# Allegro board NINA_B201_170322.brd
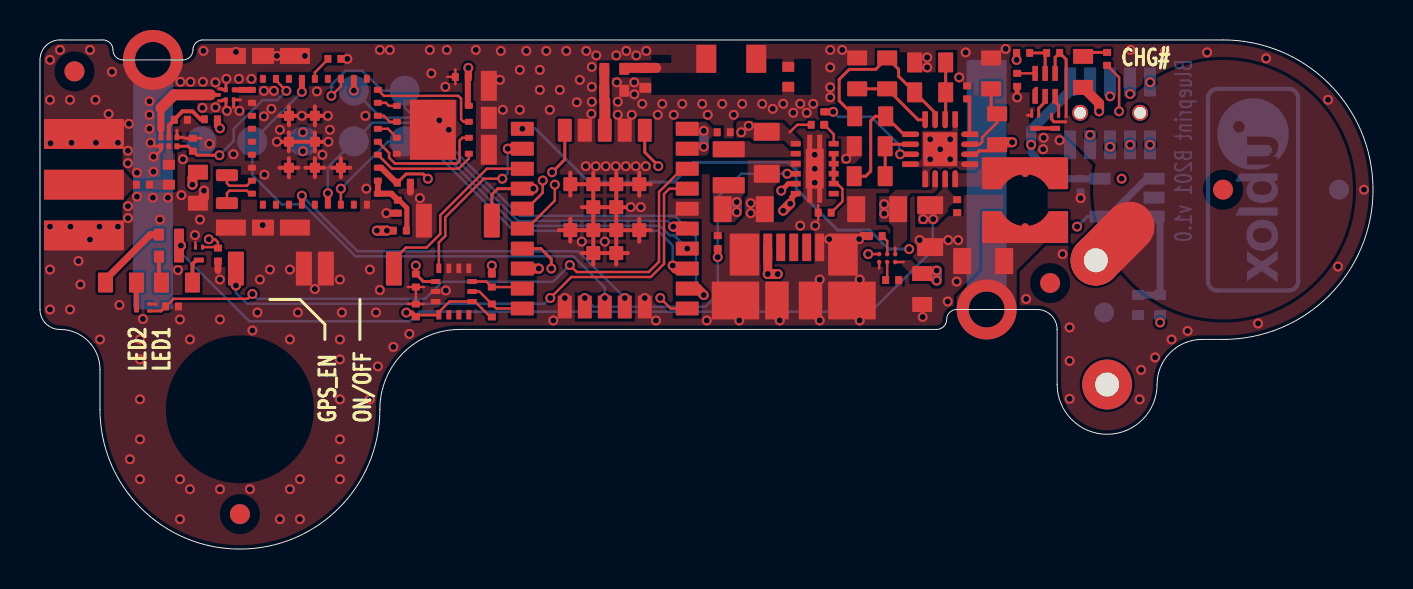
[diagram p0: board, top side]
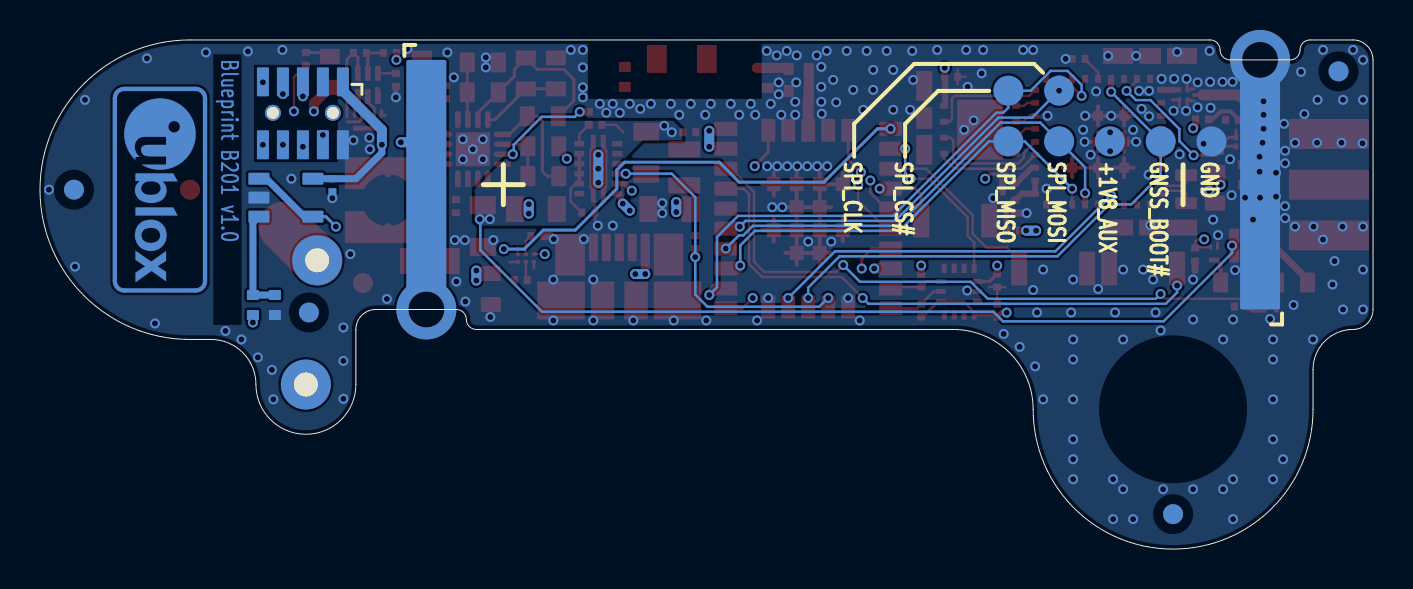
[diagram p1: board, bottom side, seen from below]

Outline 66.67 x 25.5 mm; copper layers: TOP, L2, L3, BOTTOM. Coordinates in mm from the lower left corner of the outline.
Outline path: 0,24.5 0,12 arc(0.29,11.29) 1,11 arc(2.41,10.41) 3,9 3,7 arc(10,0) 17,7 arc(18.17,9.83) 21,11 44.85,11 arc(45.2,11.15) 45.35,11.5 arc(45.5,11.85) 45.85,12 49.88,12 arc(50.58,11.71) 50.88,11 50.88,8.25 arc(53.38,5.75) 55.88,8.25 arc(56.53,9.84) 58.12,10.5 59.17,10.5 arc(66.67,18) 59.17,25.5 8.15,25.5 arc(7.8,25.35) 7.65,25 arc(7.5,24.65) 7.15,24.5 4.15,24.5 arc(3.8,24.65) 3.65,25 arc(3.5,25.35) 3.15,25.5 1,25.5 arc(0.29,25.21) 0,24.5

## Placement (name value [footprint] x y rotation side)
ANT3  1001312  [1001312_MIRRORED]  34.58 24.55 0 top
C1  100n  [0201]  34.2 20.87 180 top
C5  100n  [0201]  50.67 24.85 0 top
C6  10u  [0805]  36.35 19.85 90 top
C7  10u  [0805]  47.17 14.42 180 top
C8  100n  [0201]  18.8 13.45 270 top
C9  100n  [0201]  18.8 11.95 90 top
C10  10u  [0805]  35.2 17.02 0 top
C11  10u  [0805]  41.88 17.02 180 top
C12  10u  [0805]  44.52 16.17 270 top
C13  100n  [0201]  45.88 17.17 270 top
C14  10n  [0201]  46.38 22.87 90 top
C15  100n  [0201]  17.9 17.15 90 top
C16  100n  [0201]  18.2 18.35 0 top
C17  100n  [0201]  7.05 21.5 180 top
C18  1n  [0201]  5.15 18.25 180 top
C19  100n  [0201]  21.1 23.65 0 top
C23  1u  [0603]  44.12 13.02 270 top
C24  1u  [0603]  7.9 18.1 270 top
C113  100n  [0201]  52.05 18.22 270 bottom
D1  LED Green  [0603]  6.85 13.35 0 top
D4  LED Green  [0603]  52.17 23.9 270 top
D5  LED Green  [0603]  4.05 13.35 0 top
FID1  -  [FID1000]  10 1.75 0 top
FID2  -  [FID1000]  59.17 18 0 top
FID3  -  [FID1000]  1.73 23.92 0 top
FID4  -  [FID1000]  50.52 13.32 0 top
FID5  -  [FID1000]  10 1.75 180 bottom
FID6  -  [FID1000]  53.23 11.85 180 bottom
FID7  -  [FID1000]  64.97 18 180 bottom
FID8  -  [FID1000]  1.73 23.92 180 bottom
FIL1  -  [B8813]  9.3 22.75 0 top
J1  Header_2x5  [SFM210-LP_E-D5-SM-BK]  53.52 21.82 270 bottom
J2  CP1454-A3-ST  [CP1454A3ST]  59.17 18 225 top
J4  SMA (F) edge  [CONSMA003]  2.2 18.25 90 top
J5  SMT Clip  [S1001-46R]  11.15 16.1 0 top
J6  SMT Clip  [S1001-46R]  22.45 21.6 90 top
J7  SMT Clip  [S1001-46R]  11.15 24.7 0 top
J9  -  [0473460001]  37.7 12.45 90 top
L1  22u  [744031220]  49.27 17.47 270 top
L2  2u2  [MLP2016]  34.45 19.12 270 top
L3  6n2  [0402]  6.45 18.75 270 top
L6  6n2  [0402]  37.42 23.65 90 top
NOREF  -  [unnamed]  10 7 0 top
NOREF#2  -  [#2]  60.67 18 270 bottom
Q1  CSD17381F4  [0402FEMTO]  7.95 14.8 90 top
Q2  CSD17381F4  [0402FEMTO]  49.77 21.4 90 top
Q3  CSD17381F4  [0402FEMTO]  50.77 21.4 90 top
Q4  CSD17381F4  [0402FEMTO]  5.15 12.1 0 top
R1  4K7  [0201]  22.6 13.45 270 top
R2  4K7  [0201]  22.6 11.95 90 top
R3  470R  [0402]  6.45 14.65 180 top
R4  330  [0201]  49.17 24.85 0 top
R5  100k  [0201]  33.9 15.37 90 top
R6  100k  [0201]  8.9 14.75 270 top
R7  2K2  [0201]  48.88 23.5 270 top
R8  5M49  [0603]  44.52 22.87 0 top
R9  620k  [0603]  41.52 21.67 0 top
R10  2M43  [0603]  47.88 21.02 90 top
R11  5M49  [0603]  42.38 23.82 270 top
R12  100k  [0201]  39.25 16.85 180 top
R13  4M42  [0603]  44.52 24.37 180 top
R14  9M31  [0603]  47.58 23.82 90 top
R15  4M42  [0603]  40.88 23.82 90 top
R16  5M49  [0603]  41.5 18.67 0 top
R17  3M92  [0603]  41.5 20.17 180 top
R18  100k  [0201]  7.65 20.25 90 top
R19  10K  [0201]  41.8 15.67 180 top
R20  2K2  [0201]  42.62 13.47 0 top
R21  2K2  [0201]  53.38 24.55 90 top
R54  0R  [0201]  8.55 21.52 0 top
R55  0R  [0402]  28.73 24.05 180 top
R56  0R  [0402]  28.73 22.95 0 top
R57  0R  [0402]  30.27 23.6 270 top
R58  470R  [0402]  6.45 15.75 180 top
R59  100k  [0201]  6.6 12.15 0 top
R60  0R  [0201]  14.72 24.55 180 top
R61  2M  [0402]  54.92 12.22 270 bottom
R62  3M  [0402]  56.02 12.22 90 bottom
R63  0R  [0201]  39.23 21.57 270 top
R64  0R  [0201]  38.9 21.25 0 top
R65  0R  [0201]  18 15.95 0 top
SW2  -  [B3U-1000P]  16 14.05 180 top
SW3  -  [B3U-1000P]  11.5 14.05 0 top
SW4  -  [B3U-1000P]  20.9 16.45 180 top
TP1  TP_S1500  [TP_S1500_NO_PASTE]  15.7 22.96 180 bottom
TP2  TP_S1500  [TP_S1500_NO_PASTE]  18.24 22.96 180 bottom
TP3  TP_S1500  [TP_S1500_NO_PASTE]  18.24 20.42 180 bottom
TP4  TP_S1500  [TP_S1500_NO_PASTE]  15.7 20.42 180 bottom
TP6  TP_S1500  [TP_S1500_NO_PASTE]  13.16 20.42 180 bottom
TP7  TP_S1500  [TP_S1500_NO_PASTE]  8.08 20.42 180 bottom
TP8  TP_S1500  [TP_S1500_NO_PASTE]  10.62 20.42 180 bottom
U1  NINA-B111  [UBLOX_NINA_LGA42]  28.25 18.25 90 top
U2  BQ29700  [WSON6]  50.27 23.25 0 top
U3  -  [SLMD121H04L]  26.5 18.25 0 bottom
U4  LSM6DSL  [LGA-14L]  20.7 12.9 270 top
U5  BQ25504  [VQFN-16]  45.02 20.02 90 top
U6  TPS62740  [WSON12_3X2]  38.75 19.05 270 top
U7  EVA-M8M  [LGA43]  13.75 20.4 0 top
U8  BGA825L6S  [TSLP-6-3]  6.45 20.4 0 top
U9  MX25U1635E  [USON8]  19.65 21 0 top
U10  BQ25101  [DSBGA6]  42.38 14.57 90 top
U12  LPV801  [SOT23-5]  54.38 17.6 270 bottom
Y1  32.768KHz  [2SMD_20X12]  9.35 18.02 90 top

## Library data of the parts
ANT3 = 1001312
C1 C5-C19 C23 C24 C113 = CAP-NP
D1 D4 D5 = LED
FID1-FID8 = FIDUCIAL
FIL1 = SAW-5PIN
J1 = HEADER_2X5
J2 = CPXX54
J4 = SMA_RF_5P
J5-J7 = S1001-46R
J9 = 105017-0001
L1-L3 L6 = INDUCTOR
Q1-Q4 = N-MOS-FEMTO
R1-R21 R54-R65 = RES
SW2-SW4 = PUSHBUTTON_2P
TP1-TP4 TP6-TP8 = TEST_POINT
U1 = NINA-B1
U2 = BQ297XX
U3 = SOLARCELL-2P
U4 = LSM6DSL
U5 = BQ25504
U6 = TPS62740
U7 = EVA_M8M
U8 = BGA825L6S
U9 = MX25U1635E
U10 = BQ25101
U12 = OPAMP_TLV8801
Y1 = CRYSTAL_2P

## Footprints (pads in the part's own frame, mm; a bottom-side part is the same pattern mirrored in y, then rotated)
2SMD_20X12
  custom 0.6x1.1 smd: 1(-0.7,0) 2(0.7,0)
0201
  custom 0.35x0.4 smd: 1(-0.325,0) 2(0.325,0)
0402
  custom 0.5x0.6 smd: 1(-0.5,0) 2(0.5,0)
0402FEMTO
  custom 0.25x0.15 smd: 1(0.325,-0.175) 2(0.325,0.175)
  custom 0.25x0.5 smd: 3(-0.325,0)
0603
  custom 0.75x1 smd: 1(-0.775,0) 2(0.775,0)
0805
  custom 0.9x1.3 smd: 1(-1.05,0) 2(1.05,0)
1001312_MIRRORED
  custom 1x1.4 smd: 1(-1.25,0) 2(1.25,0)
0473460001
  custom 1.38x0.45 smd: 1(2.66,1.3) 2(2.66,0.65) 3(2.66,0) 4(2.66,-0.65) 5(2.66,-1.3)
  custom 2.1x1.476 smd: 6(2.3,2.462) 7(2.3,-2.462)
  custom 1.9x2.376 smd: 8(0,2.913) 9(0,-2.913)
  custom 1.9x1.176 smd: 10(0,0.838) 11(0,-0.838)
744031220
  custom 1.6x4.3 smd: 1(-1.35,0) 2(1.35,0)
B3U-1000P
  custom 0.8x1.7 smd: 1(-1.7,0) 2(1.7,0)
B8813
  custom 0.25x0.18 smd: 1(-0.385,0)
  custom 0.18x0.25 smd: 2(0,-0.25) 3(0.385,-0.25) 4(0.385,0.25) 5(0,0.25)
CONSMA003
  custom 1.5x4 smd: 1(0,0) 2(2.54,0) 3(-2.54,0)
CP1454A3ST
  round 2.5 hole 1.2: 1(11,2.8) 2(7,-2)
DSBGA6
  round 0.225 smd: A1(0.2,-0.4) A2(-0.2,-0.4) B1(0.2,0) B2(-0.2,0) C1(0.2,0.4) C2(-0.2,0.4)
FID1000
  round 1 smd: 1(0,0)
LGA43
  custom 0.4x0.3 smd: 1(-3.15,2.6) 2(-3.15,1.95) 3(-3.15,1.3) 4(-3.15,0.65) 5(-3.15,0) 6(-3.15,-0.65) 7(-3.15,-1.3) 8(-3.15,-1.95) 9(-3.15,-2.6) 19(3.15,-2.6) 20(3.15,-1.95) 21(3.15,-1.3) 22(3.15,-0.65) 23(3.15,0) 24(3.15,0.65) 25(3.15,1.3) 26(3.15,1.95) 27(3.15,2.6)
  custom 0.3x0.4 smd: 10(-2.6,-3.15) 11(-1.95,-3.15) 12(-1.3,-3.15) 13(-0.65,-3.15) 14(0,-3.15) 15(0.65,-3.15) 16(1.3,-3.15) 17(1.95,-3.15) 18(2.6,-3.15) 28(2.6,3.15) 29(1.95,3.15) 30(1.3,3.15) 31(0.65,3.15) 32(0,3.15) 33(-0.65,3.15) 34(-1.3,3.15) 35(-1.95,3.15) 36(-2.6,3.15)
  custom 0.5x0.5 smd: 37(-1.3,1.3) 38(-1.3,0) 39(-1.3,-1.3) 40(0,1.3) 41(0,0) 42(0,-1.3) 43(1.3,-1.3)
LGA-14L
  custom 0.476x0.25 smd: 1(-1.162,0.75) 2(-1.162,0.25) 3(-1.162,-0.25) 4(-1.162,-0.75) 8(1.162,-0.75) 9(1.162,-0.25) 10(1.162,0.25) 11(1.162,0.75)
  custom 0.25x0.476 smd: 5(-0.5,-0.912) 6(0,-0.912) 7(0.5,-0.912) 12(0.5,0.912) 13(0,0.912) 14(-0.5,0.912)
MLP2016
  custom 0.8x1.6 smd: 1(-0.9,0) 2(0.9,0)
S1001-46R
  rect 1.5x0.8 smd: 1(-1.6,0) 3(1.6,0)
  rect 1.1x0.8 smd: 2(0,0)
SFM210-LP_E-D5-SM-BK
  round 0.8 hole 0.6 unplated: (-0.025,-1.5) (-0.025,1.5)
  custom 1.45x0.6 smd: 1(-1.575,2) 2(1.575,2) 3(-1.575,1) 4(1.575,1) 5(-1.575,0) 6(1.575,0) 7(-1.575,-1) 8(1.575,-1) 9(-1.575,-2) 10(1.575,-2)
SLMD121H04L
  custom 2x12.5 smd: 1(20.85,0) 2(-20.85,0)
SOT23-5
  custom 0.6x1.05 smd: 1(-0.95,-1.35) 2(0,-1.35) 3(0.95,-1.35) 4(0.95,1.35) 5(-0.95,1.35)
TP_S1500_NO_PASTE
  round 1.5 smd: 1(0,0)
TSLP-6-3
  custom 0.25x0.3 smd: 1(0.4,0.225) 2(0,0.225) 3(-0.4,0.225) 4(-0.4,-0.225) 5(0,-0.225) 6(0.4,-0.225)
UBLOX_NINA_LGA42
  custom 0.7x1.15 smd: 1(-6.2,-4.125) 2(-5.2,-4.125) 3(-4.2,-4.125) 4(-3.2,-4.125) 5(-2.2,-4.125) 6(-1.2,-4.125) 7(-0.2,-4.125) 8(0.8,-4.125) 9(1.8,-4.125) 10(2.8,-4.125) 16(2.8,4.125) 17(1.8,4.125) 18(0.8,4.125) 19(-0.2,4.125) 20(-1.2,4.125) 21(-2.2,4.125) 22(-3.2,4.125) 23(-4.2,4.125) 24(-5.2,4.125) 25(-6.2,4.125)
  custom 1.15x0.7 smd: 11(2.725,-2) 12(2.725,-1) 13(2.725,0) 14(2.725,1) 15(2.725,2) 26(-6.125,2) 27(-6.125,1) 28(-6.125,0) 29(-6.125,-1) 30(-6.125,-2)
  custom 0.7x0.7 smd: 31(-3.425,-0.575) 32(-3.425,0.575) 33(-2.275,-1.725) 34(-2.275,-0.575) 35(-2.275,0.575) 36(-2.275,1.725) 37(-1.125,-0.575) 38(-1.125,0.575) 39(0.025,-1.725) 40(0.025,-0.575) 41(0.025,0.575) 42(0.025,1.725)
unnamed
  round 0 hole 7 unplated: (0,0)
USON8
  custom 0.4x0.3 smd: 1(-1.8,1.2) 2(-1.8,0.4) 3(-1.8,-0.4) 4(-1.8,-1.2) 5(1.8,-1.2) 6(1.8,-0.4) 7(1.8,0.4) 8(1.8,1.2)
  custom 2.3x3 smd: 9(0,0)
VQFN-16
  custom 0.28x0.85 smd: 1(-0.75,-1.475) 2(-0.25,-1.475) 3(0.25,-1.475) 4(0.75,-1.475) 9(0.75,1.475) 10(0.25,1.475) 11(-0.25,1.475) 12(-0.75,1.475)
  custom 0.85x0.28 smd: 5(1.475,-0.75) 6(1.475,-0.25) 7(1.475,0.25) 8(1.475,0.75) 13(-1.475,0.75) 14(-1.475,0.25) 15(-1.475,-0.25) 16(-1.475,-0.75)
  custom 1.7x1.7 smd: 17(0,0)
WSON6
  custom 0.28x0.85 smd: 1(-0.5,-0.525)
  custom 0.28x0.75 smd: 2(0,-0.575) 3(0.5,-0.575) 4(0.5,0.575) 5(0,0.575) 6(-0.5,0.575)
WSON12_3X2
  rect 0.28x0.5 smd: 1(-1.25,-0.95) 2(-0.75,-0.95) 3(-0.25,-0.95) 4(0.25,-0.95) 5(0.75,-0.95) 6(1.25,-0.95) 7(1.25,0.95) 8(0.75,0.95) 9(0.25,0.95) 10(-0.25,0.95) 11(-0.75,0.95) 12(-1.25,0.95)
  custom 3.4x0.9 smd: 13(0,0)

## Nets
+1V8: C1.2 C10.1 C16.1 C113.1 J1.1 L2.2 U1.9(VCC_IO) U1.10(VCC) U6.5(VOUT) U7.21(V_BKP) U12.5(VS+)
+1V8_AUX: C8.1 C9.1 C19.2 C24.1 R1.1 R2.1 R54.2 R65.1 TP6.1 U4.5(VDDIO) U4.8(VDD) U4.12(SPI_CS#/I2C_EN) U6.6(LOAD) U9.8(VCC)
+5V: C23.1 J9.1(P1) R21.1 U10.A2(IN)
+VBAT: C11.1 J2.1 R4.1 R62.1 U5.14(VBAT) U10.A1(OUT)
GND: ANT3.1(FEED) ANT3.2(GND) C1.1 C6.1 C7.2 C8.2 C9.2 C10.2 C11.2 C12.2 C13.2 C14.2 C15.1 C16.2 C17.1 C19.1 C23.2 C24.2 C113.2 FIL1.2(GND#2) FIL1.3(GND#3) FIL1.5(GND#5) J1.2 J4.2(SHIELD1) J4.3(SHIELD2) J5.1 J5.2 J5.3 J6.1 J6.2 J6.3 J7.1 J7.2 J7.3 J9.5(P5) J9.6(SHLD1) J9.7(SHLD2) J9.8(SHLD3) J9.9(SHLD4) J9.10(SHLD5) J9.11(SHLD6) L6.1 L6.2 Q1.2(S) Q2.2(S) Q4.2(S) R5.2 R6.2 R7.2 R12.2 R13.2 R14.2 R15.2 R17.2 R18.2 R19.2 R20.2 R55.1 R56.2 R57.1 R57.2 R59.2 R60.1 R61.2 SW2.2 SW3.2 SW4.2 TP7.1 U1.6(GND1) U1.12(GND2) U1.14(GND3) U1.26(GND4) U1.30(GND5) U1.31(GND6) U1.32(GND7) U1.33(GND8) U1.34(GND9) U1.35(GND10) U1.36(GND11) U1.37(GND12) U1.38(GND13) U1.39(GND14) U1.40(GND15) U1.41(GND16) U1.42(GND17) U3.2 U4.1(SPI_MISO/SA0) U4.2(SDX) U4.3(SCX) U4.6(GND1) U4.7(GND2) U5.1(VSS1) U5.5(OT_PROG) U5.12(AVSS) U5.13(VSS2) U5.17(EPAD) U6.3(GND) U6.13(EPAD) U7.2(GND1) U7.7(VDD_USB) U7.18(GND2) U7.37(GND3) U7.38(GND4) U7.39(GND5) U7.40(GND6) U7.41(GND7) U7.42(GND8) U7.43(GND9) U8.1(GND) U8.4(GNDRF) U9.4(GND) U9.9(EPAD) U10.C2(VSS) U12.2(VS-)
VBAT_ADC: U1.16(GPIO_16) U12.1(OUT) U12.4(IN-)
VBAT_OK: R63.1 U5.11(VBAT_OK)
+VSYS: C6.2 C12.1 C13.1 R3.1 R58.1 R64.1 U5.15(VSTOR) U6.1(VIN)
A/G_IRQ: U1.17(GPIO_17) U4.4(INT1)
GNSS_BOOT#: TP8.1 U1.28(GPIO_28/NFC1) U7.33(SAFEBOOT#)
GNSS_IRQ: U1.29(GPIO_29/NFC2) U7.13(PIO13/EXTINT)
I2C_SCL: R2.2 U1.25(I2C_SCL) U4.13(SPI_CLK/SCL)
I2C_SDA: R1.2 U1.24(I2C_SDA) U4.14(SPI_MOSI/SDA)
NINA_RST#: J1.9 SW4.1 U1.19(RESET#)
SPI_CLK: TP1.1 U1.5(SPI0_CLK) U7.29(SCL/SPI_CLK)
SPI_CS#: TP2.1 U1.2(SPI0_CS0#) U7.30(SDA/SPI_CS#)
SPI_MISO: TP3.1 U1.3(SPI0_MISO) U7.16(TXD/SPI_MISO)
SPI_MOSI: TP4.1 U1.4(SPI0_MOSI) U7.15(RXD/SPI_MOSI)
SW_EN: R5.1 U1.27(GPIO_27) U6.4(CTRL)
SWD_CLK: J1.10 U1.11(SWDCLK)
SWD_IO: J1.8 U1.15(SWDIO)
UART_CTS: J1.6 U1.21(UART_CTS)
UART_RTS: J1.7 U1.20(UART_RTS)
UART_RX: J1.4 U1.23(UART_RXD)
UART_TX: J1.5 U1.22(UART_TXD)
USR_LED1: Q1.1(G) R6.1 U1.1(SPI0_CS1#)
USR_LED2: Q4.1(G) R59.1 U1.8(SWO)
USR_SW1#/BOOT: SW3.1 U1.7(GPIO_7/BOOT)
USR_SW2#: SW2.1 U1.18(GPIO_18)
N17055452: R12.1 U6.8(VSEL4) U6.9(VSEL3) U6.10(VSEL2) U6.11(VSEL1)
N17055464: L2.1 U6.2(SW)
N17056292: D1.1(ANODE) R3.2
N17056302: D1.2(CATHODE) Q1.3(D)
N17057432: C15.2 R65.2 U7.19(VCC) U7.20(VCC_IO)
N17057986: U7.9(RTC_I) Y1.1(X1)
N17057993: U7.8(RTC_O) Y1.2(X2)
N17058672: U7.22(SQI_D0) U9.5(SI/SIO0)
N17058673: U7.23(SQI_CLK) U9.6(SCLK)
N17058674: U7.24(SQI_D2) U9.3(WP#/SIO2)
N17058675: U7.25(SQI_D1) U9.2(SO/SIO1)
N17058676: U7.26(SQI_CS#) U9.1(CS#)
N17058677: U7.27(SQI_D3) U9.7(NC/SIO3)
N17059368: C17.2 R54.1 U8.2(VCC)
N17059393: R18.1 U7.35(ANT_OFF) U8.6(PON)
N17059764: C18.2 J4.1(CENTER)
N17059767: C18.1 L3.2
N17059770: L3.1 U8.5(AI)
N17060104: R60.2 U7.32(D_SEL)
N17071610: L1.1 U5.16(LBST)
N17071613: C7.1 L1.2 R10.1 U3.1 U5.2(VIN_DC)
N17072900: R10.2 R14.1 U5.3(VOC_SAMP)
N17073727: C14.1 U5.4(VREF_SAMP)
N17074128: R8.1 R9.1 R11.1 U5.7(VRDIV)
N17074307: R9.2 R16.1 U5.9(OK_HYST)
N17074312: R8.2 R13.1 U5.6(VBAT_OV)
N17074329: R11.2 R15.1 U5.8(VBAT_UV)
N17074340: R16.2 R17.1 U5.10(OK_PROG)
N17084391: Q2.3(D) Q3.3(D)
N17085051: C5.2 J2.2 Q3.2(S) U2.4(VSS)
N17085476: C5.1 R4.2 U2.5(BAT)
N17085493: Q3.1(G) U2.3(DOUT)
N17085500: Q2.1(G) U2.2(COUT)
N17085527: R7.1 U2.6(V-)
N17107184: R19.1 U10.B1(TS)
N17110451: D4.1(ANODE) R21.2
N17111448: R20.1 U10.B2(ISET)
N17111453: D4.2(CATHODE) U10.C1(CHG#)
N17123784: FIL1.1(IN) U8.3(AO)
N17123793: FIL1.4(OUT) U7.1(RF_IN)
N17128578: R55.2 R56.1 U1.13(ANT)
N17136341: D5.1(ANODE) R58.2
N17136343: D5.2(CATHODE) Q4.3(D)
N17143494: R61.1 R62.2 U12.3(IN+)
N17149140: R63.2 R64.2 U6.12(EN)

Pads without a net: FID1 1; FID2 1; FID3 1; FID4 1; FID5 1; FID6 1; FID7 1; FID8 1; J1 3; J9 2 3 4; U2 1; U4 9 10 11; U6 7; U7 3 4 5 6 10 11 12 14 17 28 31 34 36

## Via types
v1: diameter 0.5, hole 0.3, TOP to BOTTOM, 339 vias
v2: diameter 3, hole 1.8, TOP to BOTTOM, 2 vias

## Routing (per net, layer and track width the routed paths; a pad name or vN(x,y) marks a point on that pad's centre or on a via; arc(x,y) is an arc through that point)
+1V8: length 30.6
  TOP w0.15: v1(19.4,18.55) 19.16,18.79 18.31,18.79 C16.1
  TOP w0.25: U6.5 37.42,18.3 v1(37.08,17.95)
  TOP w0.3: C16.1 17.82,18.35 17.07,19.1 U7.21
  L2 w0.5: v1(34.85,16.88) v1(34.85,17.38) ; v1(33.2,20.95) v1(33.2,20.15)
  L3 w0.45: 48.23,18.9 44.22,18.9
  L3 w0.5: 35,17.95 v1(37.08,17.95) 37.76,17.95 37.98,17.72 40.37,17.72 41.55,18.9 44.22,18.9 ; v1(49.58,20.25) 48.23,18.9
  BOTTOM w0.35: v1(49.58,20.25) 49.58,19.85 50.87,18.55 C113.1 U12.5
  BOTTOM w0.5: v1(33.2,20.95) v1(33.2,20.15) ; v1(34.85,17.38) v1(34.85,16.88) ; J1.1 51.52,22.95 49.58,21 v1(49.58,20.25)
+1V8_AUX: length 18.7
  TOP w0.125: R2.1 22.52,11.62 21.75,12.4 U4.12 20.48,12.4 19.95,11.87 U4.8
  TOP w0.15: U4.5 19.18,13.4 18.8,13.77 v1(18.8,14.2) ; C9.1 18.9,11.72 19.94,11.72 U4.8
  TOP w0.25: v1(18.32,11.84) 18.33,11.84 18.58,11.84 C9.1
  TOP w0.28: v1(37.52,17.3) 37.6,17.37 37.6,17.6 U6.6
  TOP w0.3: U9.8 21.4,22.25 21.4,23.62 C19.2
  TOP w0.35: R54.2 8.88,21.2 v1(9,21.07) ; v1(22.6,14.2) 22.6,13.77 ; v1(21.43,24.1) C19.2 ; v1(17.35,15.95) R65.1
  TOP w0.5: v1(16.85,15.95) v1(17.35,15.95) ; C24.1 7.63,18.6 7.63,18.25 v1(7.62,18.25) ; v1(37.17,16.95) v1(37.52,17.3)
  L2 w0.5: v1(37.17,16.95) v1(37.52,17.3) ; v1(16.85,15.95) v1(17.35,15.95)
  L3 w0.5: 7.85,19.22 7.85,20.56 8.37,21.07 v1(9,21.07) ; 13.15,19.05 v1(13.15,19.92) v1(13.15,20.87)
  BOTTOM w0.5: v1(37.17,16.95) v1(37.52,17.3) ; v1(16.85,15.95) v1(17.35,15.95)
+5V: length 24.3
  TOP w0.125: R21.1 53.98,23.62 v1(53.98,21.92) ; U10.A2 43.2,14.37
  TOP w0.45: J9.1 v1(36.4,13.77)
  TOP w0.5: v1(36.4,13.77) v1(36.9,13.77)
  L2 w0.5: v1(44.85,13.95) v1(44.85,13.45) ; v1(36.4,13.77) v1(36.9,13.77)
  L3 w0.125: 41.88,14.6 41.88,15 41.67,15.2 41.67,17.35 42.04,17.71 50.47,17.71 53.98,21.22 v1(53.98,21.92)
  BOTTOM w0.5: v1(44.85,13.95) v1(44.85,13.45) ; v1(36.4,13.77) v1(36.9,13.77)
+VBAT: length 16.4
  TOP w0.125: 42.77,14.77 42.77,15.1
  TOP w0.35: v1(48.85,24.5) R4.1
  L2 w0.5: v1(42.23,17.27) v1(42.23,16.8)
  L3 w0.15: v1(48.85,24.5) 55.4,24.5 56.38,23.52 56.38,20.46 55.4,19.49 55.4,17.45
  BOTTOM w0.35: R62.1 v1(56.02,11.35)
  BOTTOM w0.5: v1(42.23,17.27) v1(42.23,16.8)
GND: length 61.9
  TOP w0.125: C19.1 20.38,23.65 ; C19.1 20.77,23.27 ; C19.1 20.77,24.02 ; Q1.2 7.78,15.37 ; C12.2 44.35,15.12 ; U10.C2 41.98,14.05 ; C8.2 18.8,12.75 ; C8.2 18.4,13.12 ; C8.2 19.2,13.12 ; 38.92,16.47 R12.2 38.92,17.22 ; 18.8,12.27 18.8,12.65 ; 18.8,12.27 18.4,12.27 ; 18.8,12.27 19.2,12.27 ; J9.7 40.16,14.84
  TOP w0.15: 6.85,20.97 U8.1 7.17,20.62 ; 8.95,22.45 9.1,22.45 9.15,22.5 FIL1.2 9.3,22.12 ; 5.72,20.17 U8.4 6.05,19.97 5.88,19.8 ; 7.25,20.57 R18.2 8.05,20.57 ; 9.3,23.37 FIL1.5 9.15,23 9.1,23.05 8.95,23.05 ; 49.6,21.97 49.6,21.72 49.4,21.72 ; 9.69,22.13 FIL1.3 10.03,22.5 ; Q4.2 5.8,12.27
  TOP w0.2: U7.41 13.75,20.87 ; U7.41 13.75,19.92 ; U7.41 14.22,20.4 ; U7.41 U7.38 ; U1.32 27.68,14.25 ; U1.32 27.1,14.82 ; U1.32 U1.35 ; U1.32 U1.31 ; U1.42 U1.41 ; U1.42 26.52,17.7 ; U1.42 26.52,18.85 ; U1.41 27.68,18.85 ; U1.41 U1.38 ; U1.41 U1.40 ; U7.39 11.97,19.1 ; U7.39 12.45,18.62 ; U7.39 12.93,19.1 ; U7.39 12.45,19.57 ; U7.38 12.45,20.87 ; U7.38 11.97,20.4 ; U7.38 12.45,19.92 ; U7.40 13.28,21.7 ; U7.40 14.22,21.7 ; U7.40 13.75,22.17 ; U7.40 13.75,21.22 ; U1.39 29.98,18.85 ; U1.39 U1.40 ; U1.39 30.55,18.27 ; U1.39 29.98,17.7 ; U1.33 U1.34 ; U1.33 29.98,16.55 ; U1.33 29.98,15.4 ; U1.33 30.55,15.97 ; U1.34 U1.35 ; U1.34 U1.31 ; U1.34 U1.37 ; U7.42 13.75,18.62 ; U7.42 13.28,19.1 ; U7.42 14.22,19.1 ; U7.42 13.75,19.57 ; U7.37 12.93,21.7 ; U7.37 11.97,21.7 ; U7.37 12.45,21.22 ; U7.37 12.45,22.17 ; U7.43 14.57,19.1 ; U7.43 15.05,19.57 ; U7.43 15.05,18.62 ; U7.43 15.53,19.1 ; U1.31 29.4,14.82 ; U1.31 28.82,14.25 ; U1.35 U1.36 ; U1.35 U1.38 ; U1.40 28.82,18.85 ; U1.40 U1.37 ; U1.36 26.52,15.4 ; U1.36 25.95,15.97 ; U1.36 26.52,16.55 ; U1.38 U1.37 ; U1.38 27.1,17.12 ; U1.37 29.4,17.12
  TOP w0.25: R7.2 48.88,22.77
  TOP w0.35: v1(17.32,16.82) 17.9,16.82 ; C16.2 18.52,17.87 ; R6.2 8.9,13.95
  TOP w0.4: 41.48,15.67 41.12,15.67 v1(40.98,15.52)
  TOP w0.5: R55.1 29.27,24.1 R57.1 30.82,24.1 ; C24.2 8.2,17.62 v1(8.2,17.95)
  L3 w0.5: v1(52.05,17.57) C113.2 ; v1(29.55,17.12) v1(30.05,17.12) ; v1(30.3,19.17) v1(29.8,19.17) v1(29.3,19.17) v1(28.8,19.17) v1(28.3,19.17) v1(27.8,19.17) v1(27.3,19.17) ; v1(35.55,17.32) v1(35.55,16.82)
  BOTTOM w0.15: C113.2 v1(52.05,17.57)
  BOTTOM w0.5: v1(38.75,19.75) v1(38.75,19.05) v1(38.75,18.35)
  vias: v1(0.5,24.5) v1(0.5,22.5) v1(0.53,20.32) v1(0.5,16.15) v1(0.5,14) v1(0.5,12) v1(1,25) v1(1.5,22.5) v1(1.52,16.15) v1(1.5,12) v1(1.57,20.35) v1(1.93,14.42) v1(2.02,13.25) v1(2.5,25) v1(2.5,15.5) v1(2.77,22.5) v1(2.8,20.35) v1(2.98,16.15) v1(3,10.5) v1(3.43,21.79) v1(3.6,23.9) v1(3.9,20.35) v1(3.9,16.15) v1(3.98,12.22) v1(4.4,19.95) v1(4.4,19.32) v1(4.4,17.17) v1(4.4,16.57) v1(4.45,21.3) v1(4.5,4.5) v1(4.85,18.85) v1(4.85,17.65) v1(5,10.5) v1(5,9.5) v1(5,7.5) v1(5,5.5) v1(5,3.5) v1(5.15,11.52) v1(5.47,22.42) v1(5.47,21.75) v1(5.47,21.05) v1(5.53,20.35) v1(5.67,19.65) v1(5.67,18.9) v1(5.65,17.6) v1(6,16.5) v1(6.4,17.6) v1(6.9,13.97) v1(7.03,23.4) v1(7,11.5) v1(7,3.5) v1(7,1.5) v1(7.08,17.72) v1(7.15,19.52) v1(7.53,23.4) v1(7.5,10.5) v1(7.5,3) v1(7.75,15.72) v1(8,16.5) v1(8.12,22.1) v1(8.18,24.95) v1(8.15,23.4) v1(8.47,20.3) v1(8.78,23.37) v1(8.78,22.12) v1(9,13.5) v1(9,11.5) v1(9,3) v1(9.32,23.55) v1(9.35,21.95) v1(9.68,19.77) v1(9.8,24.9) v1(9.95,23.55) v1(9.97,21.95) v1(10.5,3) v1(10.57,23.55) v1(10.62,10.95) v1(10.88,11.85) v1(11,13.5) v1(11.14,16.23) v1(11.2,22.95) v1(11.2,21.67) v1(11.22,18.75) v1(11.5,14) v1(11.57,22.05) v1(11.7,22.95) v1(11.85,24.7) v1(11.85,20.4) v1(12,21) v1(12,1.5) v1(12.5,14) v1(12.5,10.5) v1(12.5,3) v1(12.9,11.85) v1(13,3.5) v1(13,1.5) v1(13.1,21.7) v1(13.25,24.7) v1(13.85,22.92) v1(13.75,13.02) v1(14.12,19.75) v1(14.4,21.7) v1(14.43,20.4) v1(14.5,21) v1(15,13.5) v1(15,10.5) v1(15,9.5) v1(15,7.5) v1(15,5.5) v1(15,4.5) v1(15,3.5) v1(15.1,11.85) v1(15.38,24.55) v1(16.27,21.7) v1(16.32,18.05) v1(16.5,14) v1(16.5,7.5) v1(16.81,11.85) v1(16.9,9.15) v1(17,25) v1(17,12.97) v1(17.5,25) v1(17.68,10.12) v1(18.48,10.77) v1(19,17.57) v1(19.5,25) v1(19.57,23.82) v1(19.98,21.47) v1(20.27,23.15) v1(20.3,12.95) v1(20.35,25) v1(20.45,21) v1(21.8,25) v1(23,23.5) v1(23.05,24.95) v1(23.15,22) v1(24,24) v1(24,22) v1(24.32,24.95) v1(25,24) v1(25,23) v1(25.32,24.95) v1(25.5,22) v1(25.68,11.45) v1(26,23) v1(26.25,12.57) v1(26.32,24.95) v1(26.85,22.37) v1(27,23.5) v1(27.1,15.4) v1(27.32,24.95) v1(27.6,24.15) v1(27.6,23.15) v1(27.6,22.4) v1(27.57,21.8) v1(27.82,24.72) v1(28.25,15.4) v1(28.82,24.72) v1(28.85,23.37) v1(28.9,22.4) v1(28.9,21.75) v1(29.32,24.95) v1(29.6,21.75) v1(29.73,23.37) v1(29.73,22.77) v1(29.82,24.72) v1(30.12,22.3) v1(30.25,12.57) v1(30.32,24.95) v1(30.81,11.45) v1(30.9,21.75) v1(31.12,22.3) v1(31.7,21.75) v1(32.12,22.3) v1(33.12,22.3) v1(33.4,21.75) v1(33.35,11.45) v1(34.12,22.3) v1(34.7,21.75) v1(34.98,11.45) v1(35.12,22.3) v1(36.12,22.3) v1(36.65,22.05) v1(37,11.45) v1(37.17,22.3) v1(37.67,21.85) v1(38.02,22.3) v1(38.02,16.2) v1(38.35,21.85) v1(38.67,22.3) v1(38.77,16.2) v1(39,13.5) v1(39,11.45) v1(39.52,25) v1(39.52,24.12) v1(39.52,23.12) v1(39.52,22.62) v1(39.48,15.52) v1(40.12,25) v1(40.33,19.55) v1(41,13.5) v1(41,11.45) v1(44,15.47) v1(44.15,11.62) v1(44.38,24.62) v1(44.38,24.12) v1(44.52,20.52) v1(44.52,19.52) v1(45.02,20.02) v1(45.43,15.47) v1(45.4,12.4) v1(45.52,20.52) v1(45.52,19.52) v1(45.92,15.47) v1(45.85,13.4) v1(45.98,23.62) v1(46.3,24.87) v1(48.3,25.05) v1(48.88,22.62) v1(49.33,12.52) v1(50.2,20.6) v1(50.17,20.02) v1(51,20.47) v1(51.15,14.77) v1(51.5,11.1) v1(51.5,9.42) v1(51.5,7.52) v1(54.1,18.55) v1(54.55,25) v1(55,7.5) v1(55.08,8.97) v1(55.77,9.6) v1(56.27,24.92) v1(56.6,10.5) v1(57.4,10.92) v1(58.38,24.87) v1(60.92,11.3) v1(61.33,24.57) v1(64.42,22.5) v1(64.92,14.15) v1(66.22,18) v2(5.65,24.5)
VBAT_ADC: length 36.9
  L3 w0.15: v1(43.48,15.02) 50.75,15.02 v1(51.88,16.15)
  BOTTOM w0.15: U12.4 52.38,16.65 v1(51.88,16.15) ; v1(43.48,15.02) 42.45,15.02 41.5,15.97 39.9,15.97 37.83,18.05 37.83,18.99 37.44,19.37 32.7,19.37 31.7,18.37 27.46,18.37 24.79,21.05 v1(24.12,21.05)
  BOTTOM w0.35: U12.1 55.35,18.55 53.45,16.65 U12.4
VBAT_OK: length 5.5
  TOP w0.125: U5.11 v1(43.02,19.77)
  TOP w0.35: R63.1 v1(39.67,21.9)
  BOTTOM w0.125: v1(43.02,19.77) 43.02,19.85 42.98,19.9 42.98,20.25 41.58,21.65 39.92,21.65 v1(39.67,21.9)
+VSYS: length 46.8
  TOP w0.125: 37.5,20.87 37.88,21.25 38.58,21.25
  TOP w0.5: R58.1 6.95,15.3 ; 6.95,15.3 6.95,15.1 ; 6.95,15.3 v1(7.05,15.2) 6.95,15.1 ; 6.95,15.1 R3.1
  L2 w0.5: v1(35.45,21.2) 35.4,21.2 v1(35.08,20.87) ; v1(44.17,16.52) v1(44.67,16.52)
  L3 w0.5: v1(44.17,16.52) v1(44.67,16.52) ; v1(35.45,21.2) 35.12,20.87 v1(35.08,20.87)
  BOTTOM w0.125: v1(7.05,15.2) 7.05,14.83 10.47,11.41 18.51,11.41 18.99,11.89 41.56,11.89 44.65,14.97 44.65,16.27
A/G_IRQ: length 8.7
  TOP w0.125: v1(23.12,18.55) 22.2,18.55 20.27,16.62 20.27,15.68 19.95,15.36 U4.4
  TOP w0.5: v1(23.4,20.05) U1.17
  BOTTOM w0.125: v1(23.4,20.05) 23.4,18.82 v1(23.12,18.55)
GNSS_BOOT#: length 26.8
  TOP w0.125: v1(28.25,12.57) U1.28
  TOP w0.3: U7.33 v1(13.1,22.9)
  BOTTOM w0.125: v1(28.25,12.57) 28.25,13.09 26.68,14.66 15.78,14.66 13.18,17.26 12.09,17.26 10.62,18.74 TP8.1 v1(13.1,22.9)
GNSS_IRQ: length 19.2
  TOP w0.3: U7.13 v1(13.1,17.7)
  TOP w0.5: v1(29.25,12.57) U1.29
  BOTTOM w0.125: v1(13.1,17.7) 15.89,14.91 26.91,14.91 v1(29.25,12.57)
I2C_SCL: length 2.9
  TOP w0.125: U4.13 21.98,12.9 22.82,12.05 U1.25
I2C_SDA: length 2.7
  TOP w0.125: U1.24 24.05,13.12 R1.2 22.32,13.4 U4.14
NINA_RST#: length 37.8
  TOP w0.15: SW4.1 22.6,17.75 22.9,18.05 U1.19
  TOP w0.5: v1(24.68,18.05) U1.19
  L3 w0.125: v1(24.68,18.05) 24.67,18.61 25.38,19.31 25.84,19.31 26.42,18.74 31.1,18.74 31.83,19.46 35.26,19.46 36.74,20.94 41.53,20.94 42.39,21.8 49.67,21.8 51.73,23.86 55.04,23.86 v1(55.52,23.38)
  BOTTOM w0.125: J1.9 v1(55.52,23.38)
SPI_CLK: length 20.2
  TOP w0.3: U7.29 v1(15.7,22.96)
  TOP w0.5: v1(31.68,16.15) 32.27,16.15 U1.5
  BOTTOM w0.125: v1(31.68,16.15) 31.39,16.44 23.9,16.44 18.73,21.61 17.05,21.61 v1(15.7,22.96) 15.7,23.02
SPI_CS#: length 28.1
  TOP w0.125: v1(14.57,22.7) 15.05,23.17 U7.30
  TOP w0.5: v1(33.2,12.72) 32.88,13.05 U1.2
  BOTTOM w0.125: v1(14.57,22.7) 14.57,23.25 15.28,23.95 16.12,23.95 17.11,22.96 TP2.1 18.24,22.11 18.49,21.86 18.84,21.86 24.01,16.69 31.76,16.69 32.81,15.63 32.81,13.11 v1(33.2,12.72)
SPI_MISO: length 22.3
  TOP w0.125: v1(15.05,18.05) U7.16
  TOP w0.5: v1(31.65,14.2) 31.8,14.05 U1.3
  BOTTOM w0.125: v1(15.05,18.05) 17.42,20.42 TP3.1 19.21,20.42 23.69,15.94 30.92,15.94 31.65,15.2 v1(31.65,14.2)
SPI_MOSI: length 23.4
  TOP w0.3: U7.15 v1(14.4,17.82)
  BOTTOM w0.125: v1(32.38,15.05) 31.71,15.71 31.49,15.71 31.02,16.19 23.8,16.19 18.63,21.36 16.64,21.36 TP4.1 14.4,19.12 v1(14.4,17.82)
SW_EN: length 17.2
  TOP w0.125: v1(27.25,12.57) U1.27
  TOP w0.28: U6.4 v1(37.38,18.8)
  TOP w0.35: R5.1 v1(33.9,14.62)
  BOTTOM w0.125: v1(27.25,12.57) 27.26,12.57 27.7,12.14 33.29,12.14 33.9,12.75 v1(33.9,14.62) 33.9,17.62 35.08,18.8 v1(37.38,18.8)
SWD_CLK: length 33
  TOP w0.125: 30.93,19.2 v1(30.93,19.18)
  TOP w0.15: U1.11 30.25,19.87 30.93,19.2
  L3 w0.125: v1(30.93,19.18) 31.46,19.71 35.16,19.71 36.63,21.19 41.42,21.19 42.29,22.05 49.56,22.05 51.63,24.11 55.41,24.11 56.11,23.41 56.11,20.84 v1(55.52,20.25)
SWD_IO: length 38.3
  TOP w0.15: U1.15 26.25,19.51 v1(25.61,18.87)
  L3 w0.125: v1(25.61,18.87) 25.93,18.87 26.31,18.49 31.21,18.49 31.93,19.21 35.37,19.21 36.84,20.69 41.63,20.69 42.49,21.55 49.77,21.55 51.83,23.61 54.67,23.61 55.86,22.42 55.86,21.21 54.91,20.25 v1(54.52,20.25)
UART_CTS: length 39
  TOP w0.125: v1(25.75,18.25) 25.75,17.45 24.35,16.05 U1.21
  L3 w0.125: v1(53.52,20.15) 54.06,20.69 54.99,20.69 55.61,21.31 55.61,22.32 54.57,23.36 51.94,23.36 49.88,21.3 42.6,21.3 41.73,20.44 36.94,20.44 35.47,18.96 32.04,18.96 31.31,18.24 25.76,18.24 v1(25.75,18.25)
UART_RTS: length 34.8
  TOP w0.125: v1(25.15,18.46) 25.15,17.85 24.35,17.05 U1.20
  L3 w0.125: v1(54.52,22.79) 54.2,23.11 52.1,23.11 50.04,21.05 42.7,21.05 41.84,20.19 37.05,20.19 35.57,18.71 32.14,18.71 31.42,17.99 26.34,17.99 26.16,17.81 25.44,17.81 25.15,18.1 v1(25.15,18.46)
  BOTTOM w0.125: v1(54.52,22.79) J1.7
UART_RX: length 32.6
  TOP w0.5: U1.23 v1(24.95,14.05)
  L3 w0.125: v1(52.52,20.74) 50,18.21 41.83,18.21 40.66,17.04 38.24,17.04 34.47,13.26 25.29,13.26 24.95,13.6 v1(24.95,14.05)
  BOTTOM w0.125: v1(52.52,20.74) J1.4
UART_TX: length 36.3
  TOP w0.15: U1.22 25.05,15.05 25.57,14.52 v1(25.57,14.05)
  L3 w0.125: v1(25.57,14.05) 25.57,13.67 25.74,13.51 34.36,13.51 38.14,17.29 40.55,17.29 41.73,18.46 49.89,18.46 51.44,20.01 51.44,22.09 52.02,22.67 v1(53.52,22.67)
  BOTTOM w0.125: v1(53.52,22.67) J1.5
USR_LED1: length 29.5
  TOP w0.125: Q1.1 8.85,15.12 R6.1 8.9,15.37 8.76,15.51 v1(8.45,15.51) ; U1.1 31.55,12.05 v1(31.02,12.57)
  L3 w0.125: v1(31.02,12.57) 30.59,13.01 21.71,13.01 20.45,11.75 18.85,11.75 18.51,11.41 10.47,11.41 8.45,13.43 v1(8.45,15.51)
USR_LED2: length 32.4
  TOP w0.125: U1.8 32.12,19.05 30.96,17.89 30.96,14.39 30.45,13.87 26.85,13.87 v1(26.5,14.22) ; v1(10.62,12.77) 10.39,12.54 6.69,12.54 6.3,12.15 6.28,12.15
  TOP w0.15: Q4.1 6.05,11.92 6.28,12.15
  BOTTOM w0.125: v1(10.62,12.77) 10.86,12.54 19.27,12.54 20.12,13.39 25.66,13.39 v1(26.5,14.22)
USR_SW1#/BOOT: length 28.4
  TOP w0.125: v1(25.52,12.57) 26.57,13.62 30.55,13.62 31.21,14.29 31.21,17.78 31.48,18.05 U1.7
  TOP w0.5: v1(9.8,13.2) SW3.1
  BOTTOM w0.125: v1(9.8,13.2) 9.8,12.85 10.36,12.29 25.24,12.29 v1(25.52,12.57)
USR_SW2#: length 9.3
  TOP w0.125: SW2.1 17.7,14.5 18.3,15.1 19.34,15.1 20.02,15.79 20.02,16.72 22.35,19.05 U1.18
N17055452: length 3.5
  TOP w0.125: U6.8 39.88,18.3 40.14,18.04 40.14,17.41 R12.1
  TOP w0.2: U6.8 U6.9 U6.10 U6.11
N17056292: length 1.4
  TOP w0.2: 6.08,13.35 5.95,13.47 R3.2
N17056302: length 1.3
  TOP w0.2: D1.2 7.62,14.27 7.83,14.47 Q1.3
N17057432: length 3.5
  TOP w0.25: R65.2 18.35,15.97 18.35,17.09 17.96,17.47 C15.2
  TOP w0.3: U7.20 U7.19 17.57,17.8 C15.2
N17057986: length 1.9
  TOP w0.125: U7.9 10.5,17.8 10.35,17.95 9.47,17.95 9.35,17.82 9.35,17.32
N17057993: length 1.8
  TOP w0.125: 9.35,18.72 9.35,18.32 9.47,18.2 10.35,18.2 U7.8
N17058672: length 5.3
  TOP w0.125: U9.5 21.45,19.56 20.94,19.05 17.6,19.05 U7.22
N17058673: length 6.3
  TOP w0.125: U7.23 17.46,19.84 17.46,19.6 17.75,19.31 20.85,19.31 20.99,19.45 20.99,20.46 21.12,20.6 U9.6
N17058674: length 1.1
  TOP w0.125: U7.24 17.4,21.05 U9.3
N17058675: length 1.1
  TOP w0.125: U9.2 17.5,21.4 17.2,21.7 U7.25
N17058676: length 1
  TOP w0.125: U7.26 17.3,22.35 17.45,22.2 U9.1
N17058677: length 5.8
  TOP w0.125: U9.7 21.19,21.4 21.06,21.52 21.06,22.56 20.93,22.7 17.2,22.7 U7.27
N17059368: length 2.8
  TOP w0.2: U8.2 6.45,21.22 C17.2 6.72,21.52 7.12,21.92 7.63,21.92 8.03,21.52 8.22,21.52
N17059393: length 8.2
  TOP w0.125: U7.35 11.8,23.47 v1(12.32,22.95)
  TOP w0.15: v1(8.97,19.72) 7.85,19.72 R18.1 7.4,20.17 U8.6
  BOTTOM w0.125: v1(12.32,22.95) 11.86,22.49 11.13,22.49 9.68,21.04 9.68,20.43 v1(8.97,19.72)
N17060104: length 1.3
  TOP w0.125: U7.32 13.75,23.87 14.4,24.52 R60.2
N17071613: length 5.5
  TOP w0.15: U5.2 46.8,19.77 46.98,19.95 47.58,19.95 R10.1
  TOP w0.5: R10.1 48,20.37 v1(48.62,20.37)
  BOTTOM w0.5: U3.1 47.35,19.87 47.85,20.37 v1(48.62,20.37)
  vias: v2(47.35,12)
N17072900: length 3.8
  TOP w0.125: R10.2 47.88,21.36 47.12,20.61 47.12,20.4 47,20.27 U5.3
  TOP w0.15: R10.2 47.58,22.1 R14.1
N17073727: length 1.8
  TOP w0.15: C14.1 46.5,22.42 U5.4
N17074128: length 9.1
  TOP w0.15: R9.1 39.98,22.45 39.98,23.52 40.48,24.02 41.8,24.02 R11.1 42.95,24.03 42.95,23.68 R8.1 44.77,21.85 U5.7
N17074307: length 5.9
  TOP w0.15: U5.9 43.2,20.77 R9.2 41.77,21.67 41.55,21.45 41.55,18.92 41.3,18.67 R16.1
N17074312: length 2.9
  TOP w0.15: R13.1 R8.2 45.3,21.52 U5.6
N17074329: length 4
  TOP w0.15: U5.8 43.92,21.5 R11.2 R15.1
N17074340: length 2.8
  TOP w0.15: R16.2 R17.1 42.38,20.27 U5.10
N17084391: length 1
  TOP w0.2: Q3.3 Q2.3
N17085051: length 7.8
  TOP w0.15: U2.4 50.77,24.62 C5.2 51.33,24.52 51.33,21.65 ; 51.3,21.4 50.73,21.4 50.6,21.52 50.6,21.72
  TOP w2.5: 54.5,16.15 52.8,14.45 J2.2
N17085476: length 1.9
  TOP w0.15: U2.5 50.27,24.77 C5.1 R4.2
N17085493: length 1
  TOP w0.15: U2.3 50.77,22.4 50.95,22.22 50.95,21.72
N17085500: length 1.1
  TOP w0.15: 49.95,21.72 49.95,22.07 50.27,22.39 U2.2
N17085527: length 0.9
  TOP w0.125: U2.6 R7.1
N17107184: length 1
  TOP w0.125: 42.38,14.77 42.38,15.42 R19.1
N17110451: length 1.3
  TOP w0.15: 52.17,24.67 52.38,24.87 R21.2
N17111448: length 0.9
  TOP w0.125: R20.1 42.38,13.55 U10.B2
N17111453: length 19
  TOP w0.125: 41.98,14.77 v1(41.42,14.77)
  TOP w0.5: D4.2 52.98,22.32 v1(52.98,21.92)
  L3 w0.125: v1(41.42,14.77) 41.42,17.45 41.93,17.96 50.37,17.96 52.98,20.57 v1(52.98,21.92)
N17123784: length 4.6
  TOP w0.18: 8.53,22.75 FIL1.1
  TOP w0.2: U8.3 6.05,21.02
  TOP w0.35: 6.05,21.02 6.05,22.1
  TOP w0.55: 8.53,22.75 6.7,22.75 6.05,22.1
N17123793: length 0.9
  TOP w0.18: 9.75,23 FIL1.4
  TOP w0.25: 10,23 9.75,23
  TOP w0.3: U7.1 10,23
N17128578: length 3.1
  TOP w0.5: R55.2 R56.1 28.23,22.5 28.25,22.47
  TOP w0.55: 28.25,22.47 U1.13
N17136341: length 3.8
  TOP w0.35: R58.2 5.53,15.75 3.27,13.5 D5.1
N17136343: length 1.2
  TOP w0.25: Q4.3 D5.2
N17143494: length 5.1
  BOTTOM w0.35: U12.3 56.02,16.35 R62.2 R61.1
N17149140: length 1.1
  TOP w0.125: U6.12 39.7,20.77 R64.2

## Copper pours and planes (outline as drawn; the poured copper is in the pictures)
+1V8 on TOP: 33.65,18.62 35.25,18.62 35.25,17.8 35.1,17.65 35.1,16.75 34.73,16.37 33.73,16.37 33.65,16.45
+1V8 on TOP: 34.05,21.07 33.65,21.07 33.33,21.4 31.8,21.4 31.8,20.7 32.95,20.7 33.02,20.62 33.02,20.47 32.95,20.4 31.8,20.4 31.8,19.7 33.33,19.7 33.45,19.82 33.45,20.47 33.65,20.67 34.05,20.67
+1V8 on L3: 22.02,21.55 19.07,18.6 19.07,16.77 19.48,16.37 34.7,16.37 35.15,16.82 35.15,17.47 35.25,17.57 35.25,18.52 34.2,19.57 34.2,21.17 34.02,21.35 27.15,21.35 26.95,21.55
+1V8_AUX on L3: 35.4,16.85 34.77,16.22 19.4,16.22 18.93,16.7 18.93,18.67 21.8,21.55 21.8,24.35 21.68,24.47 21.2,24.47 16.07,19.35 7.6,19.35 7.35,19.1 7.35,18.02 10.65,14.72 16.62,14.72 18.07,13.27 18.07,11.67 18.15,11.6 18.43,11.6 18.77,11.95 20.35,11.95 22,13.6 34.17,13.6 37.77,17.2 37.77,17.4 37.6,17.57 35.4,17.57
+5V on TOP: 43.88,14.17 44.58,14.17 44.6,14.2 44.98,14.2 45.1,14.07 45.1,13.32 44.98,13.2 44.73,13.2 44.5,13.42 43.62,13.42 43.62,13.7 43.12,14.2 43.12,14.47 43.58,14.47
+5V on L3: 35.83,13.57 35.83,12.27 44.55,12.27 45.33,13.05 45.33,14.22 42.5,14.22 42.08,14.65 36.9,14.65
+VBAT on TOP: 44.9,18.67 44.9,18.02 44.7,17.82 43.58,17.82 43.38,17.62 43.38,15.5 42.85,14.97 42.67,14.97 42.67,16.12 42.42,16.37 41.98,16.37 41.98,17.67 42.48,17.67 42.8,18 44.12,18 44.15,17.97 44.38,17.97 44.4,18 44.55,18 44.65,18.1 44.65,18.67
+VBAT on L3: 52.1,8.22 53.38,6.95 54.65,8.22 54.65,9.15 56.5,11 56.5,16.5 55.48,17.52 42.23,17.52 42.05,17.45 41.98,17.27 41.98,16.1 42.2,15.87 52.83,15.87 54.2,14.5 52.83,13.12 52.1,13.12
GND on BOTTOM (solid shape): 61.9,14.48 61.42,14.16 61.9,13.85 61.9,13.36 61.1,13.93 60.37,13.41 60.37,13.88 60.79,14.16 60.37,14.43 60.37,14.93 61.11,14.4 61.9,14.95
GND on BOTTOM (solid shape): 61.9,18.44 61.71,18.44 61.86,18.23 61.9,18.15 61.92,18.05 61.93,17.99 61.93,17.96 61.92,17.88 61.9,17.79 61.86,17.7 61.8,17.6 61.73,17.52 61.63,17.45 61.51,17.4 61.35,17.35 61.2,17.33 61.05,17.33 60.92,17.35 60.78,17.38 60.66,17.43 60.56,17.5 60.48,17.58 60.4,17.71 60.35,17.84 60.34,17.93 60.34,18 60.35,18.09 60.64,18.09 60.64,18.06 60.66,17.98 60.69,17.92 60.73,17.87 60.77,17.83 60.84,17.78 60.92,17.76 61.05,17.74 61.18,17.74 61.26,17.75 61.36,17.77 61.43,17.79 61.49,17.83 61.54,17.88 61.58,17.93 61.6,17.98 61.61,18.04 61.61,18.09 61.61,18.13 61.58,18.19 61.55,18.25 61.5,18.31 61.45,18.34 61.38,18.38 61.3,18.4 61.2,18.41 61.13,18.42 61.11,18.42 61.02,18.41 60.9,18.39 60.79,18.34 60.74,18.31 60.71,18.27 60.68,18.22 60.65,18.15 60.64,18.09 60.35,18.09 60.38,18.18 60.42,18.26 60.47,18.33 60.55,18.41 59.79,18.41 60.01,18.81 61.9,18.81
GND on BOTTOM (solid shape): 61.31,16.48 61.43,16.45 61.51,16.42 61.59,16.38 61.68,16.32 61.73,16.26 61.8,16.17 61.84,16.1 61.89,16 61.91,15.89 61.93,15.77 61.93,15.66 61.92,15.59 61.91,15.52 61.89,15.46 61.85,15.36 61.81,15.3 61.77,15.23 61.71,15.16 61.65,15.1 61.58,15.05 61.47,15 61.35,14.96 61.23,14.93 61.16,14.93 61.1,14.93 61.01,14.93 60.91,14.96 60.81,14.99 60.7,15.05 60.59,15.13 60.52,15.2 60.45,15.29 60.4,15.39 60.37,15.51 60.35,15.63 60.34,15.69 60.34,15.74 60.66,15.74 60.66,15.7 60.67,15.65 60.68,15.6 60.71,15.54 60.75,15.49 60.78,15.44 60.83,15.41 60.88,15.39 60.94,15.36 61,15.35 61.09,15.34 61.17,15.34 61.24,15.34 61.31,15.36 61.38,15.38 61.43,15.41 61.5,15.46 61.53,15.5 61.56,15.55 61.58,15.61 61.6,15.66 61.61,15.69 61.61,15.72 61.6,15.77 61.58,15.83 61.56,15.88 61.5,15.97 61.44,16.02 61.38,16.04 61.31,16.07 61.23,16.08 61.16,16.09 61.11,16.09 60.98,16.07 60.91,16.05 60.83,16.02 60.78,15.97 60.74,15.93 60.7,15.87 60.68,15.82 60.66,15.74 60.34,15.74 60.35,15.83 60.37,15.94 60.41,16.07 60.47,16.17 60.55,16.27 60.63,16.34 60.72,16.39 60.83,16.45 60.96,16.48 61.05,16.5 61.2,16.5
GND on BOTTOM (solid shape): 61.58,19.24 61.53,19.21 61.42,19.16 61.31,19.11 61.2,19.07 61.08,19.04 60.97,19.02 60.85,19 60.73,19 60.61,19 60.49,19.01 60.37,19.02 60.25,19.05 60.13,19.08 60.02,19.12 59.91,19.17 59.8,19.22 59.7,19.28 59.6,19.35 59.51,19.43 59.42,19.51 59.34,19.6 59.26,19.69 59.19,19.79 59.13,19.89 59.07,19.99 59.02,20.1 58.98,20.22 58.94,20.33 58.92,20.45 58.9,20.57 58.89,20.69 58.88,20.81 58.89,20.93 58.9,21.05 58.93,21.17 59.68,21.17 59.68,21.12 59.69,21.08 59.7,21.03 59.73,20.99 59.76,20.95 59.79,20.92 59.83,20.9 59.87,20.88 59.92,20.87 59.97,20.86 60.01,20.87 60.06,20.88 60.1,20.9 60.14,20.92 60.18,20.95 60.21,20.99 60.23,21.03 60.24,21.08 60.25,21.13 60.25,21.17 60.24,21.22 60.23,21.26 60.21,21.31 60.18,21.34 60.14,21.38 60.1,21.4 60.06,21.42 60.01,21.43 59.97,21.44 59.92,21.43 59.87,21.42 59.83,21.4 59.79,21.38 59.75,21.34 59.73,21.31 59.7,21.26 59.69,21.22 59.68,21.17 58.93,21.17 58.96,21.28 58.99,21.4 59.04,21.51 59.09,21.62 59.15,21.72 59.22,21.82 59.29,21.92 59.37,22.01 59.45,22.09 59.54,22.17 59.64,22.24 59.74,22.31 59.84,22.37 59.95,22.42 60.06,22.47 60.18,22.5 60.3,22.53 60.41,22.55 60.53,22.57 60.65,22.57 60.77,22.57 60.89,22.56 61.01,22.54 61.13,22.51 61.25,22.48 61.36,22.44 61.47,22.39 61.57,22.33 61.68,22.27 61.77,22.2 61.86,22.12 61.95,22.04 62.03,21.95 62.11,21.85 62.18,21.75 62.24,21.65 62.29,21.54 62.34,21.43 62.38,21.32 62.41,21.2 62.44,21.09 62.45,20.97 62.46,20.85 62.46,20.73 62.45,20.61 62.44,20.49 62.41,20.37 62.38,20.25 62.34,20.14 62.3,20.03 62.24,19.92 62.18,19.82 62.11,19.72 62.04,19.63 61.96,19.54 61.91,19.49 61.9,19.51 61.9,19.64 61.68,19.64 61.75,19.7 61.81,19.78 61.87,19.88 61.91,19.97 61.93,20.07 61.94,20.15 61.94,20.17 61.92,20.27 61.9,20.35 61.86,20.43 61.81,20.5 61.76,20.55 61.7,20.58 61.61,20.62 61.55,20.63 61.36,20.65 60.37,20.65 60.37,20.25 61.23,20.25 61.36,20.24 61.44,20.23 61.48,20.22 61.55,20.17 61.59,20.12 61.61,20.06 61.62,19.99 61.61,19.92 61.59,19.86 61.57,19.82 61.52,19.77 61.47,19.72 61.41,19.7 61.31,19.67 61.17,19.67 60.37,19.67 60.37,19.26 61.57,19.26
GND on TOP: 10,0.2 3.2,7 3.2,9 2.54,10.54 1,11.2 0.43,11.45 0.2,12.02 0.2,16.35 4.13,16.35 4.13,17.3 4.75,17.92 6.88,17.92 6.88,19.9 7.1,19.9 7.1,20.9 6.48,20.9 6.48,21.82 6.7,21.82 7.03,22.15 7.73,22.15 7.88,22 7.88,22.35 6.85,22.35 6.48,21.97 6.48,22.12 7.08,22.72 9.03,22.72 9.03,22.2 9.95,22.2 9.95,22.72 10.93,22.72 10.93,23.2 16.55,23.2 16.55,17.5 17.25,17.5 17.25,20.3 18.18,20.3 18.18,22.5 17.5,22.5 17.5,20.75 17.25,20.75 17.25,23.3 16.65,23.3 16.65,23.9 10.85,23.9 10.85,23.3 9.03,23.3 9.03,22.77 6.33,22.77 5.75,22.2 5.75,20.9 5.8,20.85 5.8,19.9 6.03,19.9 6.03,18.57 4.75,18.57 4.13,19.2 4.13,20.15 0.2,20.15 0.2,24.47 0.44,25.06 1.03,25.3 3.15,25.3 3.36,25.21 3.66,24.5 4.15,24.3 4.15,24.5 7.15,24.5 7.15,24.3 7.64,24.5 7.94,25.21 8.15,25.3 34.32,25.3 59.18,25.3 66.47,18 59.18,10.7 58.13,10.7 56.39,9.98 55.67,8.25 53.38,5.95 51.08,8.25 51.08,11 50.72,11.85 49.88,12.2 45.85,12.2 45.35,11.99 45.06,11.29 44.85,11.2 21,11.2 18.03,9.97 16.8,7 ; 50 cut-outs
GND on BOTTOM: 8.8,25.3 30.57,25.3 30.57,22.55 39.27,22.55 39.27,25.3 59.17,25.3 66.47,18 59.17,10.7 58.12,10.7 56.39,9.98 55.67,8.25 53.38,5.95 51.08,8.25 51.08,11 50.72,11.85 49.88,12.2 45.85,12.2 45.35,11.99 45.06,11.29 44.85,11.2 21.5,11.2 21,11.2 18.03,9.97 16.8,7 10,0.2 3.2,7 3.2,9 2.54,10.54 1,11.2 0.43,11.45 0.2,12.02 0.2,24.47 0.44,25.06 1.02,25.3 3.15,25.3 3.36,25.21 3.66,24.5 4.15,24.3 4.15,24.5 7.15,24.5 7.15,24.3 7.64,24.5 7.94,25.21 8.15,25.3 ; 5 cut-outs
GND on L2: 8.32,25.3 30.57,25.3 30.57,22.55 39.27,22.55 39.27,25.3 59.17,25.3 66.47,18 59.17,10.7 58.12,10.7 56.39,9.98 55.67,8.25 53.38,5.95 51.08,8.25 51.08,11 50.72,11.85 49.88,12.2 45.85,12.2 45.35,11.99 45.06,11.29 44.85,11.2 21,11.2 18.03,9.97 16.8,7 10,0.2 3.2,7 3.2,9 2.54,10.54 1,11.2 0.43,11.45 0.2,12.02 0.2,24.47 0.44,25.06 1.02,25.3 3.15,25.3 3.36,25.21 3.66,24.5 4.15,24.3 4.15,24.5 7.15,24.5 7.15,24.3 7.64,24.5 7.94,25.21 8.15,25.3
GND on L3: 8.62,25.3 30.57,25.3 30.57,22.55 39.27,22.55 39.27,25.3 59.17,25.3 66.47,18 59.17,10.7 58.12,10.7 56.39,9.98 55.67,8.25 53.38,5.95 51.08,8.25 51.08,11 50.72,11.85 49.88,12.2 45.85,12.2 45.35,11.99 45.06,11.29 44.85,11.2 21,11.2 18.03,9.97 16.8,7 10,0.2 3.2,7 3.2,9 2.54,10.54 1,11.2 0.43,11.45 0.2,12.02 0.2,24.47 0.44,25.06 1.02,25.3 3.15,25.3 3.36,25.21 3.66,24.5 4.15,24.3 4.15,24.5 7.15,24.5 7.15,24.3 7.64,24.5 7.94,25.21 8.15,25.3 ; 4 cut-outs
+VSYS on TOP: 45.15,18.67 45.4,18.67 45.4,18.02 45.75,17.67 46,17.67 46,17.32 45.67,17.32 45.42,17.07 45.42,16.9 44.8,16.27 43.93,16.27 43.93,17.65 44.75,17.65 45.15,18.05
+VSYS on TOP: 38,20.2 37.48,20.2 37.23,20.45 35.7,20.45 35.55,20.6 34.83,20.6 34.83,21.35 34.92,21.45 35.65,21.45 35.75,21.35 37.15,21.35 38,20.5
+VSYS on BOTTOM: 34.55,21 35,21.45 41.5,21.45 44.92,18.02 44.92,16.4 44.73,16.2 39.95,16.2 38.02,18.12 38.02,19.07 37.52,19.57 37.42,19.57 36.52,20.47 34.55,20.47
N17055464 on TOP: 38.05,19.95 37.5,19.95 37.15,20.3 35.62,20.3 35.5,20.42 33.65,20.42 33.65,19.62 37.48,19.62 37.5,19.65 38.05,19.65
N17059764 on TOP: 4.83,18.45 4.65,18.45 4.2,18.9 2.2,18.9 2.2,17.6 4.2,17.6 4.65,18.05 4.83,18.05
N17071610 on TOP: 50.93,19.62 50.93,18.77 47.98,18.77 47.35,18.15 45.65,18.15 45.65,18.82 46.8,18.82 47.08,19.1 47.08,19.62
N17071613 on TOP: 47.12,13.92 47.12,16.17 51.4,16.17 51.4,15.35 50.25,15.35 48.85,13.95 48.85,12 45.85,12 45.85,12.65
N17085051 on TOP: 53.85,21.72 65.15,15.44 52.8,19.27 51.23,20.85 51.23,21.72

Small or netless copper shapes (teardrops, artwork), in the pictures only: 1 on BOTTOM, 2 on TOP

## Text on the board
BOTTOM: Blueprint B201 v1.0 | Bottom (Layer 4)
Ref Des/Silkscreen Bottom: GND | GNSS_BOOT# | +1V8_AUX | SPI_MOSI | SPI_MISO | SPI_CS# | SPI_CLK
User.Comments: 1.0 | 1.1 | 1.2 | First revision | Pinout reviewed | Minor Fixes | CONFIDENTIAL - PROPERTY OF U-BLOX AG | NINA Blueprint: B201 | Viewed from top side | 1:1 | 01
TOP: Top (Layer 1)
Ref Des/Silkscreen Top: CHG# | LED2 | LED1 | GPS_EN | ON/OFF
L2: Inner 2 (Layer 2)
L3: Inner 3 (Layer 3)
XSECTION_CHART: *  SURFACE - AIR 0 UM | L1: TOP CONDUCTOR - COPPER 35 UM | *  DIELECTRIC - FR-4 573 UM | L2: L2 PLANE - COPPER 35 UM | *  DIELECTRIC - FR-4 300 UM | L3: L3 PLANE - COPPER 35 UM | L4: BOTTOM CONDUCTOR - COPPER 35 UM | DESIGN CROSS SECTION CHART | ___________________________ | TOTAL THICKNESS 1586 UM | FIGURE | SIZE | 300.0 | 1200.0 | 1800.0 | 600.0 | 7000.0 | DRILL CHART: TOP to BOTTOM | ALL UNITS ARE IN MICRONS | PLATED | NON-PLATED | QTY | 339 | 2 | 1
PAGE_OUTLINE: SMA Helix Antenna | UNLESS OTHERWISE SPECIFIED | DIMENSIONS ARE IN MM | TOLERANCES ON: | 2 PL DECIMALS + | 3 PL DECIMALS + | ANGLES + | FRACTIONS + | SIGNATURES | sbia | 16/02/2017 | DATE | 28/11/2016 | 15/12/2016 | REV | SIZE | SCALE | DESCRIPTION | REVISIONS | DWG NO | SHEET | APPR.
